# Altium PCB UZ_per_cb_upgrade.PcbDoc
Units mm, origin at the board's own origin, x right, y up, seen from the top; angles counter-clockwise.
Board outline 35 x 100 mm, 2 copper layers (Top Layer, Bottom Layer); 95 components, 68 nets, 263 pads, 43 vias.
Unrouted connection lines stored in the file: 36.
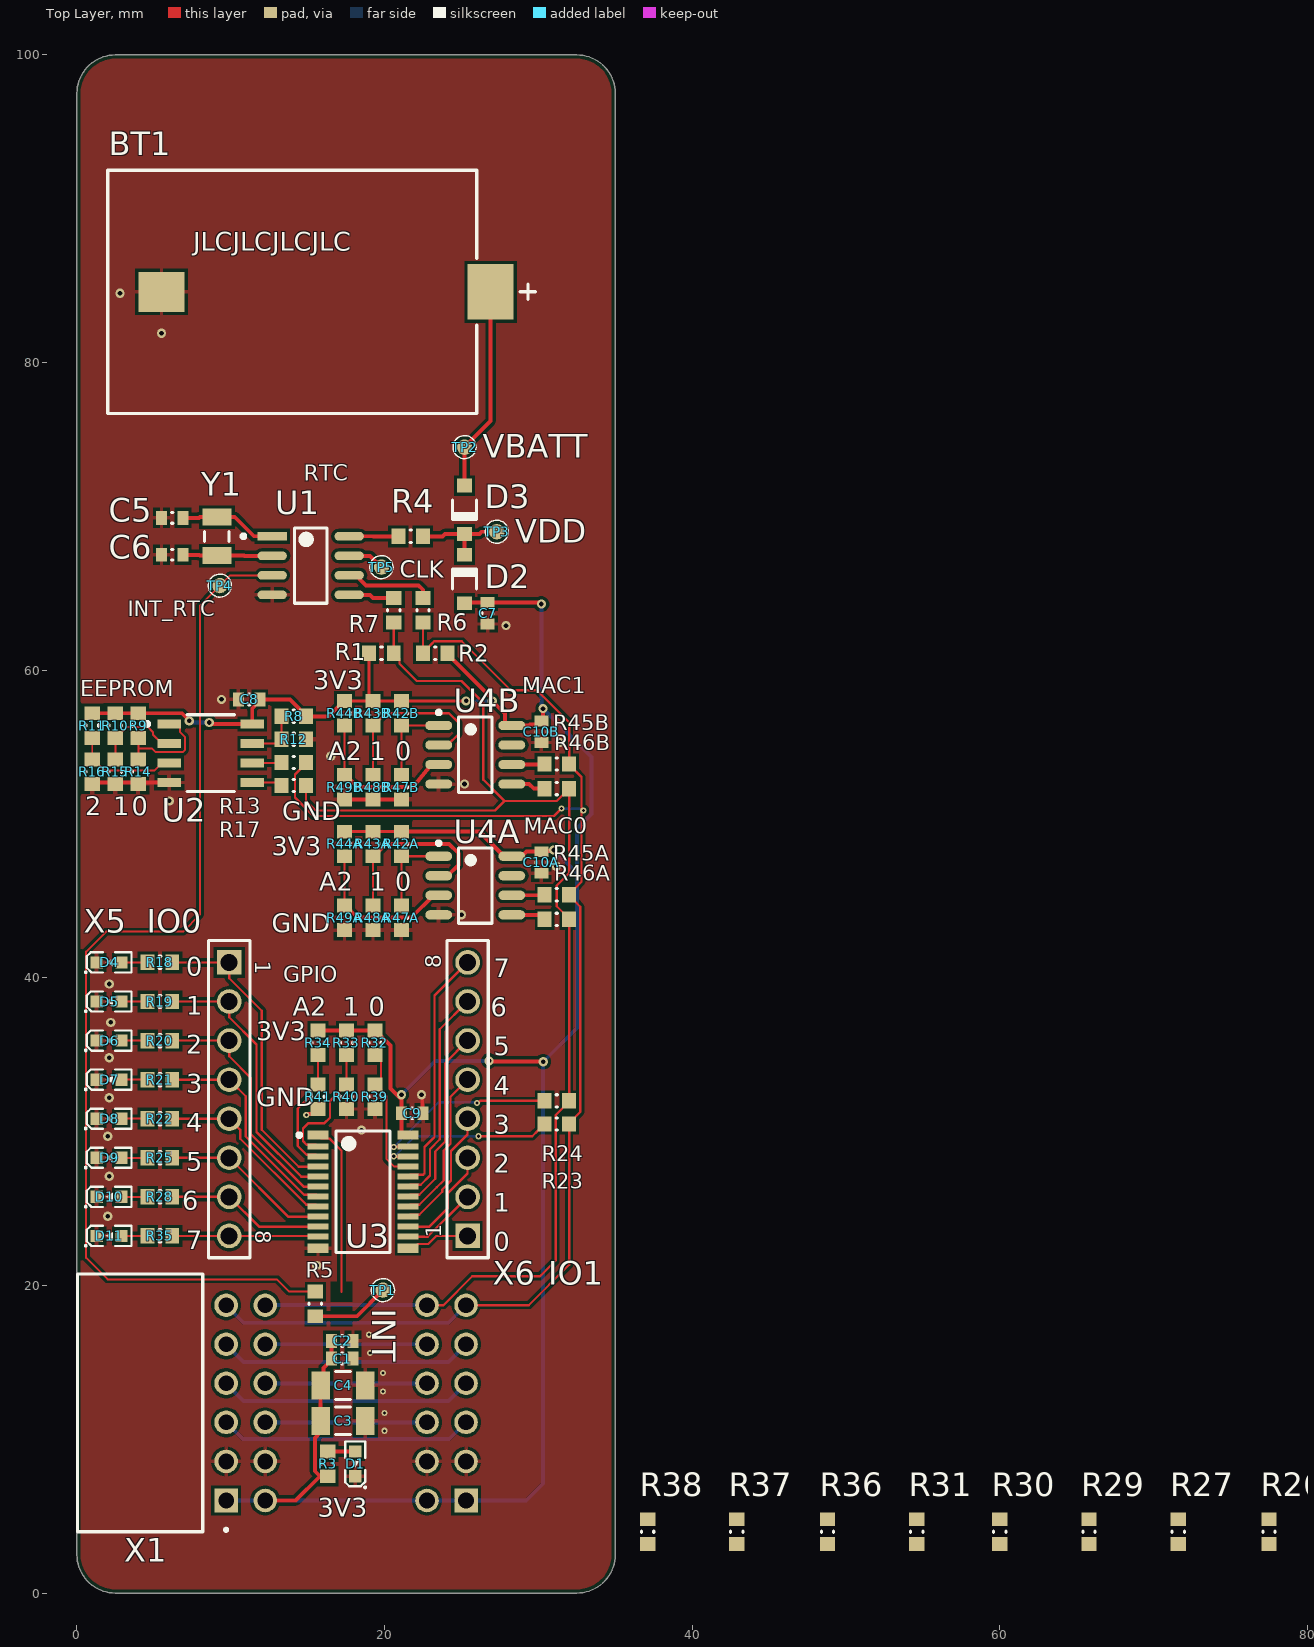
[diagram p0: Top Layer view]
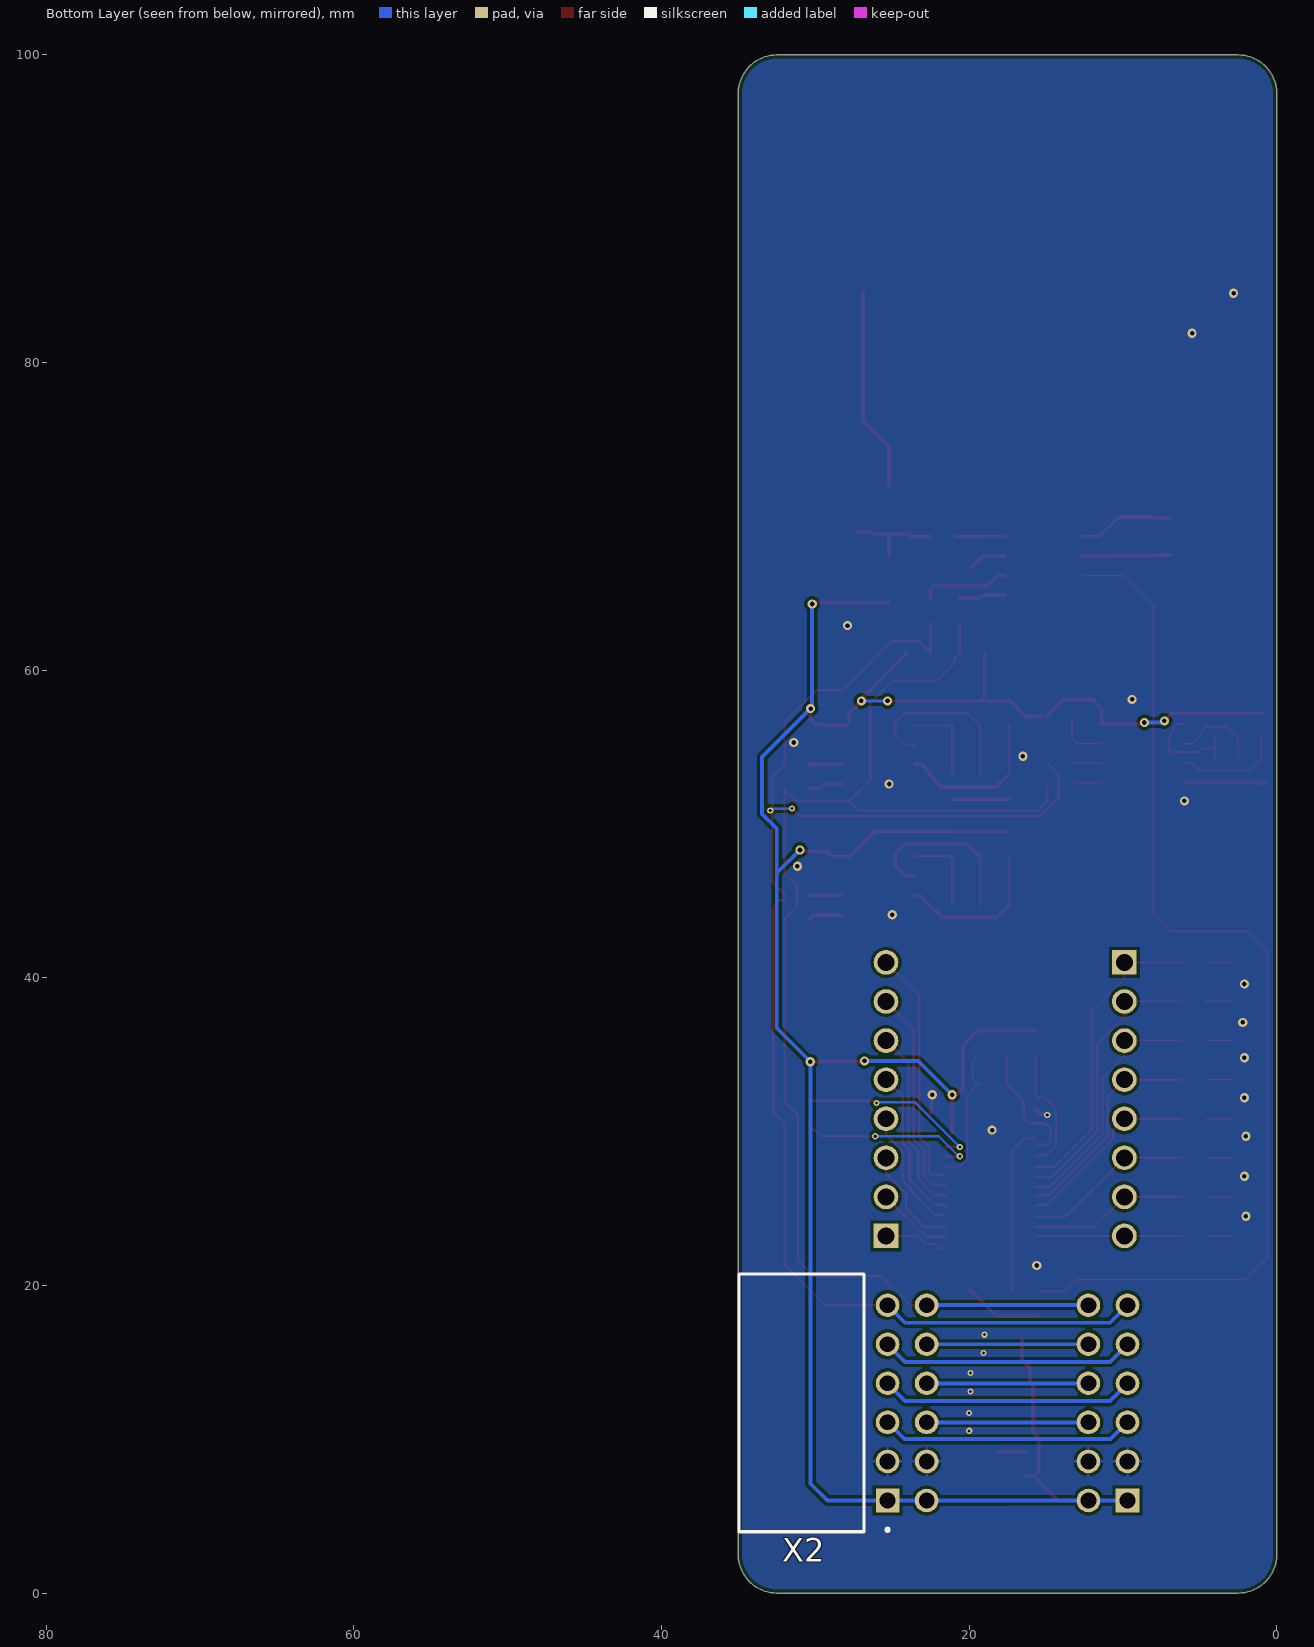
[diagram p1: Bottom Layer view, seen from below]
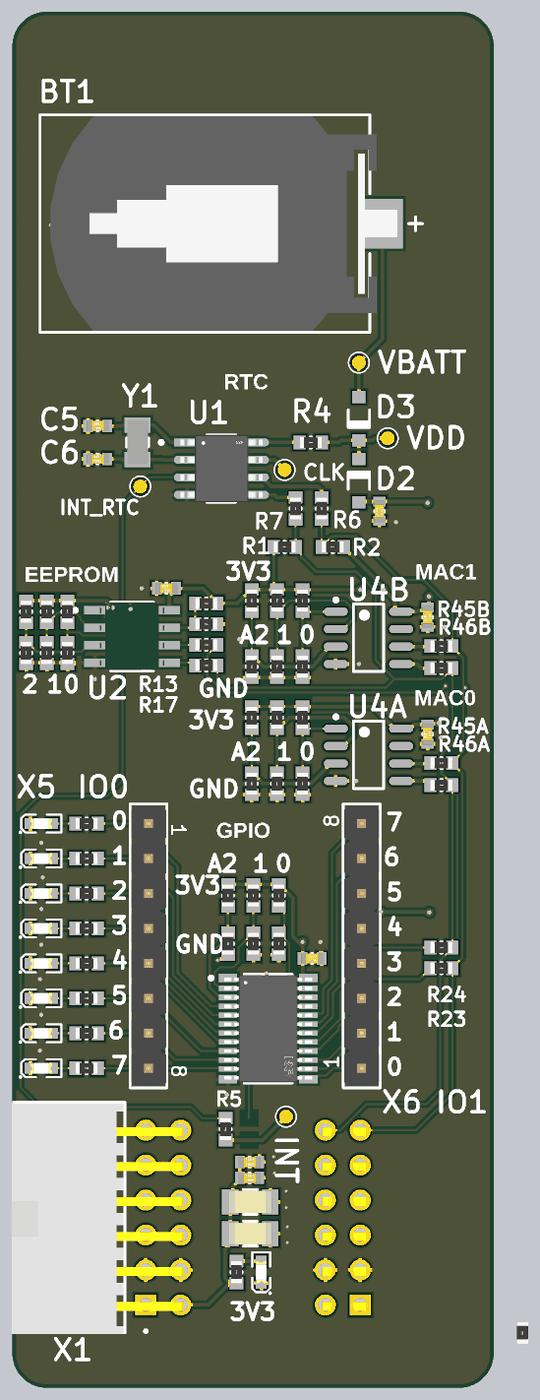
[diagram p2: 3D render of the assembled board from above, using the file's embedded part models]

## Layer stack, top to bottom
Top Solder: solder mask 0.0102, Solder Resist, Dk 3.5
Top Layer: signal copper 0.0356
Dielectric 1: dielectric 0.32, FR-4, Dk 4.8
Bottom Layer: signal copper 0.0356
Bottom Solder: solder mask 0.0102, Solder Resist, Dk 3.5

## Board outline
0,2.5 0,97.5 cw(c2.5,97.5) 2.5,100 32.5,100 cw(c32.5,97.5) 35,97.5 35,2.5 cw(c32.5,2.5) 32.5,0 2.5,0 cw(c2.5,2.5)

## Design rules (kind name [scope] priority, off if disabled: settings)
BoardOutlineClearance [All] p1: gap=0.254 ignorepadtopadclearanceinfootprint=FALSE except(0: Arc-SplitContinuation Track-SplitContinuation SMDPad-SplitContinuation THPad-SplitContinuation Via-SplitContinuation Fill-SplitContinuation Poly-SplitContinuation Region-SplitContinuation Text-SplitContinuation)
Clearance [All] p1: gap=0.2 ignorepadtopadclearanceinfootprint=TRUE
PolygonConnect [All] p1: thpad.connectstyle=Relief thpad.reliefconductorwidth=0.254 thpad.reliefentries=4 thpad.polygonreliefangle="90 Angle" thpad.airgapwidth=0.2 smdpad.connectstyle=Relief smdpad.reliefconductorwidth=0.254 smdpad.reliefentries=4 smdpad.polygonreliefangle="90 Angle" smdpad.airgapwidth=0.2 via.connectstyle=Direct via.reliefconductorwidth=0.254 via.reliefentries=4 via.polygonreliefangle="90 Angle" via.airgapwidth=0.2
RoomDefinition EEPROM_General [InComponentClass('EEPROM_General')] p1: confinementstyle=ConfineIn formatcopy=TRUE lockcomponents=FALSE outline -0.5,51.4 15.9,51.4 15.9,59 -0.5,59
RoomDefinition EEPROM_MAC1 [InComponentClass('EEPROM_MAC1')] p2: confinementstyle=ConfineIn formatcopy=TRUE lockcomponents=FALSE outline 16.3,50.6 33,50.6 33,59 16.3,59
RoomDefinition EEPROM_MAC0 [InComponentClass('EEPROM_MAC0')] p3: confinementstyle=ConfineIn formatcopy=TRUE lockcomponents=FALSE outline 16.3,42.1 33,42.1 33,50.5 16.3,50.5
RoomDefinition GPIO_Expander [InComponentClass('GPIO_Expander')] p4: confinementstyle=ConfineIn formatcopy=TRUE lockcomponents=FALSE outline 0.1,17 33,17 33,42.9 0.1,42.9
RoomDefinition RTC [InComponentClass('RTC')] p5: confinementstyle=ConfineIn formatcopy=TRUE lockcomponents=FALSE outline 1.5,58.3 30.2,58.3 30.2,93 1.5,93
RoutingVias [All] p1: holewidth=0.3 width=0.6 viastyle="Through Hole" minholewidth=0.2 minwidth=0.4 maxholewidth=0.711 maxwidth=1.27
SolderMaskExpansion [All] p1: expansion=0.102 istentingtop=FALSE
Width [All] p1: maxlimit=0.254 minlimit=0.127 preferedwidth=0.254 minimp=50.000000 maximp=50.000000 favimp=50.000000
30 further rules are at their usual default settings.

## Classes and differential pairs
component class EEPROM_General: C8 R8 R9 R10 R11 R12 R13 R14 R15 R16 R17 U2
channel class EEPROM_MAC: EEPROM_MAC0 EEPROM_MAC1
component class GPIO_Expander: C9 D4 D5 D6 D7 D8 D9 D10 D11 R18 R19 R20 R21 R22 R23 R24 R25 R26 R27 R28 R29 R30 R31 R32 R33 R34 R35 R36 R37 R38 R39 R40 R41 U3 X5 X6
component class EEPROM_MAC1: C10B R42B R43B R44B R45B R46B R47B R48B R49B U4B
component class EEPROM_MAC0: C10A R42A R43A R44A R45A R46A R47A R48A R49A U4A
component class RTC: BT1 C5 C6 C7 D2 D3 R4 R5 R6 R7 TP2 TP3 TP4 TP5 U1 Y1
component class XMOD: C1 C2 C3 C4 D1 R3 X1 X2
component class Top_sheet: INFO1 LOGO1 R1 R2 Serial1 TP1

## Components (designator, comment, footprint, x,y, rotation, side; value= is the part's Value field where it differs from the comment)
BT1 "S8421-45R" FP-S8421-45R-MFG 14,84.6 r90 top
C1 "100nF" C_0603(1608)100_L 17.25,15.25 r0 top
C2 "100nF" C_0603(1608)100_L 17.25,16.4 r0 top
C3 "10µF" C_1206 17.3,11.2 r0 top
C4 "10µF" C_1206 17.3,13.5 r0 top
C5 "10pF" C_0603(1608)100_L 6.2,69.9 r180 top
C6 "10pF" C_0603(1608)100_L 6.2,67.5 r180 top
C7 "100nF" C_0603(1608)100_L 26.7,63.7 r270 top
C8 "100nF" C_0603(1608)100_L 11.2,58.1 r180 top
C9 "100nF" C_0603(1608)100_L 21.8,31.2 r0 top
C10A "100nF" C_0603(1608)100_L 30.2,47.5 r270 top (schematic designator C10)
C10B "100nF" C_0603(1608)100_L 30.2,56 r270 top (schematic designator C10)
D1 "150060RS75000" WL-SMCW_0603 18.1,8.4 r90 top
D2 "1N4148W-7-F" DIOD-SOD123-2_V 25.2,65.925 r90 top
D3 "1N4148W-7-F" DIOD-SOD123-2_V 25.2,70.425 r270 top
D4 "150060GS75000" WL-SMCW_0603 2.1,41 r0 top
D5 "150060GS75000" WL-SMCW_0603 2.1,38.46 r0 top
D6 "150060GS75000" WL-SMCW_0603 2.1,35.92 r0 top
D7 "150060GS75000" WL-SMCW_0603 2.1,33.38 r0 top
D8 "150060GS75000" WL-SMCW_0603 2.1,30.84 r0 top
D9 "150060GS75000" WL-SMCW_0603 2.1,28.3 r0 top
D10 "150060GS75000" WL-SMCW_0603 2.1,25.76 r0 top
D11 "150060GS75000" WL-SMCW_0603 2.1,23.22 r0 top
R1 "2k" R_0603_N 19.8,61.1 r180 top
R2 "2k" R_0603_N 23.3,61.1 r0 top
R3 "680R" R_0603_N 16.3,8.4 r270 top
R4 "0R" R_0603_N 21.7,68.7 r0 top
R5 "0R" R_0603_N 15.5,18.8 r90 top
R6 "0R" R_0603_N 22.5,63.9 r90 top
R7 "0R" R_0603_N 20.6,63.9 r90 top
R8 "0R" R_0603_N 14.1,57 r180 top
R9 "0R" R_0603_N 4,56.4 r270 top
R10 "0R" R_0603_N 2.5,56.4 r270 top
R11 "0R" R_0603_N 1,56.4 r270 top
R12 "0R" R_0603_N 14.1,55.5 r0 top
R13 "0R" R_0603_N 14.1,54 r180 top
R14 "0R" R_0603_N 4,53.4 r270 top
R15 "0R" R_0603_N 2.5,53.4 r270 top
R16 "0R" R_0603_N 1,53.4 r270 top
R17 "0R" R_0603_N 14.1,52.5 r180 top
R18 "680R" R_0603_N 5.4,41 r180 top
R19 "680R" R_0603_N 5.4,38.46 r180 top
R20 "680R" R_0603_N 5.4,35.92 r180 top
R21 "680R" R_0603_N 5.4,33.38 r180 top
R22 "680R" R_0603_N 5.4,30.84 r180 top
R23 "0R" R_0603_N 31.2,30.5 r180 top
R24 "0R" R_0603_N 31.2,32 r180 top
R25 "680R" R_0603_N 5.4,28.3 r180 top
R26 "10k" R_0603_N 77.5,4 r90 top
R27 "10k" R_0603_N 71.6,4 r90 top
R28 "680R" R_0603_N 5.4,25.76 r180 top
R29 "10k" R_0603_N 65.8,4 r90 top
R30 "10k" R_0603_N 60,4 r90 top
R31 "10k" R_0603_N 54.6,4 r90 top
R32 "0R" R_0603_N 19.377,35.773 r270 top
R33 "0R" R_0603_N 17.527,35.773 r270 top
R34 "0R" R_0603_N 15.677,35.773 r270 top
R35 "680R" R_0603_N 5.4,23.22 r180 top
R36 "10k" R_0603_N 48.8,4 r90 top
R37 "10k" R_0603_N 42.9,4 r90 top
R38 "10k" R_0603_N 37.1,4 r90 top
R39 "0R" R_0603_N 19.377,32.273 r270 top
R40 "0R" R_0603_N 17.527,32.273 r270 top
R41 "0R" R_0603_N 15.677,32.273 r270 top
R42A "0R" R_0603_N 21.1,48.7 r270 top (schematic designator R42)
R42B "0R" R_0603_N 21.1,57.2 r270 top (schematic designator R42)
R43A "0R" R_0603_N 19.25,48.7 r270 top (schematic designator R43)
R43B "0R" R_0603_N 19.25,57.2 r270 top (schematic designator R43)
R44A "0R" R_0603_N 17.4,48.7 r270 top (schematic designator R44)
R44B "0R" R_0603_N 17.4,57.2 r270 top (schematic designator R44)
R45A "0R" R_0603_N 31.2,45.4 r180 top (schematic designator R45)
R45B "0R" R_0603_N 31.2,53.9 r180 top (schematic designator R45)
R46A "0R" R_0603_N 31.2,43.8 r180 top (schematic designator R46)
R46B "0R" R_0603_N 31.2,52.3 r180 top (schematic designator R46)
R47A "0R" R_0603_N 21.1,43.9 r270 top (schematic designator R47)
R47B "0R" R_0603_N 21.1,52.4 r270 top (schematic designator R47)
R48A "0R" R_0603_N 19.25,43.9 r270 top (schematic designator R48)
R48B "0R" R_0603_N 19.25,52.4 r270 top (schematic designator R48)
R49A "0R" R_0603_N 17.4,43.9 r270 top (schematic designator R49)
R49B "0R" R_0603_N 17.4,52.4 r270 top (schematic designator R49)
TP1 "INT" TP_1mm 19.9,19.7 r270 top value="Testpoint 1mm"
TP2 "VBATT" TP_1mm 25.2,74.5 r0 top value="Testpoint 1mm"
TP3 "VDD" TP_1mm 27.3,69 r0 top value="Testpoint 1mm"
TP4 "INT_RTC" TP_1mm 9.3,65.5 r0 top value="Testpoint 1mm"
TP5 "CLK" TP_1mm 19.8,66.7 r0 top value="Testpoint 1mm"
U1 "PCF8563T/5,518" FP-SOT96-1-IPC_B 15.2,66.8 r0 top
U2 "AT24C02C-SSHM-T" FP-C04-057-SN-MFG 8.7,54.6 r0 top
U3 "PCA9535PW,112" FP-SOT355-1-MFG 18.6,26.1 r0 top
U4A "24AA025E48T-I/SN" MCHP-SOIC-SN8_L 25.9,46 r0 top (schematic designator U4)
U4B "24AA025E48T-I/SN" MCHP-SOIC-SN8_L 25.9,54.5 r0 top (schematic designator U4)
X1 "IPL1-106-01-X-D-RA-K" SAMTEC_IPL1-106-01-X-D-RA-K 10.97,12.37 r90 top
X2 "IPL1-106-01-X-D-RA-K" SAMTEC_IPL1-106-01-X-D-RA-K 24.03,12.37 r90 bottom
X5 "61300811121" 61300811121 9.9,32.11 r270 top
X6 "61300811121" 61300811121 25.4,32.11 r90 top
Y1 "ABS07-32.768KHz-T" FP-ABS07-MFG 9.1,68.7 r270 top

## Footprints (in the part's own frame and the unit in brackets; to place one, negate y for a bottom-side part, rotate by r counter-clockwise, add the part's x,y. Pads: shape width x height; smd on the part's side, far side on the other; paste and mask are expansions set on the pad)
61300811121 [mm] "Pin Header, pitch 2.54 mm, THT, Vertical, single row, 8p"
  rect 1.6x1.6 hole 1.1: 1(-8.89,0)
  round 1.6 hole 1.1: 2(-6.35,0) 3(-3.81,0) 4(-1.27,0) 5(1.27,0) 6(3.81,0) 7(6.35,0) 8(8.89,0)
  silkscreen extent -10.31,-1.35 10.31,1.35, body extent -10.16,-1.27 10.16,1.27, height 8.57
C_0603(1608)100_L [mm] "Chip Capacitor, Body 1.6x0.8mm, Height 1.0mm, IPC High Density"
  rect 0.7x0.9 smd: 1(-0.7,0) 2(0.7,0)
  silkscreen extent -0.05,-0.35 0.05,0.35, body extent -0.8,-0.4 0.8,0.4, height 0.8
C_1206 [mm]
  rect 1.21x1.82 smd: 1(1.45,0) 2(-1.45,0)
  silkscreen extent -0.5,-0.9 0.5,0.9, body extent -1.6,-0.81 1.6,0.81, height 1.82
DIOD-SOD123-2_V [mm] "SOD123, 2-Leads, Body 2.7x1.55mm, Height 1.45mm"
  rect 0.9x0.95 smd: 1(-1.575,0) 2(1.575,0)
  silkscreen extent -0.64,-0.83 0.63,0.78, body extent -1.35,-0.77 1.35,0.77, height 1.45
FP-ABS07-MFG [mm]
  rect 1.1x1.9 smd paste+0 mask+0: 1(-1.25,0) 2(1.25,0)
  silkscreen extent -0.33,-0.8 0.32,0.8, body extent -1.9,-1.05 1.9,1.05, height 0.25
FP-C04-057-SN-MFG [mm]
  rect 1.55x0.6 smd paste+0 mask+0: 1(-2.7,1.905) 2(-2.7,0.635) 3(-2.7,-0.635) 4(-2.7,-1.905) 5(2.7,-1.905) 6(2.7,-0.635) 7(2.7,0.635) 8(2.7,1.905)
  silkscreen extent -4.25,-2.5 1.55,2.5, body extent -3.57,-2.75 3.57,2.75, height 0.25
FP-S8421-45R-MFG [mm]
  rect 2.6x3 smd paste+0 mask+0: 1(0,8.5)
  rect 3.6x3 smd paste+0 mask+0: 2(0,-12.9)
  silkscreen extent -7.9,-15.82 7.9,11.99, body extent -8,-14.5 8,12.09, height 0.25
FP-SOT96-1-IPC_B [mm]
  rect 1.904x0.568 smd paste+0 mask+0: 1(-2.501,1.905)
  rrect100% 1.904x0.568 smd paste+0 mask+0: 2(-2.501,0.635) 3(-2.501,-0.635) 4(-2.501,-1.905) 5(2.501,-1.905) 6(2.501,-0.635) 7(2.501,0.635) 8(2.501,1.905)
  silkscreen extent -4.5,-2.45 1.05,2.45, body extent -3.7,-2.7 3.7,2.7, height 0.25
FP-SOT355-1-MFG [mm]
  rect 1.35x0.6 smd paste+0 mask+0: 1(-2.925,3.675) 12(-2.925,-3.675) 13(2.925,-3.675) 24(2.925,3.675)
  rect 1.35x0.4 smd paste+0 mask+0: 2(-2.925,2.925) 3(-2.925,2.275) 4(-2.925,1.625) 5(-2.925,0.975) 6(-2.925,0.325) 7(-2.925,-0.325) 8(-2.925,-0.975) 9(-2.925,-1.625) 10(-2.925,-2.275) 11(-2.925,-2.925) 14(2.925,-2.925) 15(2.925,-2.275) 16(2.925,-1.625) 17(2.925,-0.975) 18(2.925,-0.325) 19(2.925,0.325) 20(2.925,0.975) 21(2.925,1.625) 22(2.925,2.275) 23(2.925,2.925)
  silkscreen extent -4.27,-3.95 1.75,3.95, body extent -3.72,-4.3 3.72,4.3, height 0.25
MCHP-SOIC-SN8_L [mm] "SOIC, 8-Leads, Body 4.9x3.9mm, Pitch 1.27mm, IPC High Density"
  oval 1.75x0.6 smd: 1(-2.375,1.905) 2(-2.375,0.635) 3(-2.375,-0.635) 4(-2.375,-1.905) 5(2.375,-1.905) 6(2.375,-0.635) 7(2.375,0.635) 8(2.375,1.905)
  silkscreen extent -2.5,-2.45 1.1,2.88, body extent -1.95,-2.45 1.95,2.45, height 1.75
R_0603_N [mm] "SMD Resistor, Body 1.6x0.8mm, IPC Medium Density"
  rect 0.9x1 smd: 1(-0.8,0) 2(0.8,0)
  silkscreen extent -0.05,-0.4 0.05,0.4, body extent -0.8,-0.4 0.8,0.4, height 0.44
SAMTEC_IPL1-106-01-X-D-RA-K [mm]
  rect 1.53x1.53 hole 1.02: 01(-6.35,1.27)
  round 1.53 hole 1.02: 02(-3.81,1.27) 03(-1.27,1.27) 04(1.27,1.27) 05(3.81,1.27) 06(6.35,1.27) 07(-6.35,-1.27) 08(-3.81,-1.27) 09(-1.27,-1.27) 10(1.27,-1.27) 11(3.81,-1.27) 12(6.35,-1.27)
  silkscreen extent -8.38,1.17 8.38,10.92, body extent -8.48,-1.49 8.28,11.02, height 8.19
TP_1mm [mm]
  round 1 smd paste-1: 1(0,0)
  silkscreen extent -0.75,-0.75 0.75,0.75
WL-SMCW_0603 [mm] "SMD Mono-color Chip LED, body 1.6x0.8mm"
  rect 0.8x0.8 smd: 1(-0.8,0) 2(0.8,0)
  silkscreen extent -1.59,-0.7 1.45,0.65, body extent -0.8,-0.4 0.8,0.4, height 0.7

## Part data
BT1: library part CMP-2000-07028-3, "BATTERY HOLDER COIN 20MM SMD", Case/Package=SMD/SMT, LCSC Part #=C964790, Max Operating Temperature=105°C, Min Operating Temperature=-40°C, Package Quantity=500, Supplier Part Number 1=855-S8421-45R, Contact Plating=Bronze, Material=Polyphenylene, Mount="Surface Mount", Number of Batteries=1, Number of Cells=1, Packaging="Tape and Reel", REACH SVHC="No SVHC", Supplier 1=Mouser, Termination=SMD/SMT
C1 C2 C7 C8 C9 C10A C10B: library part C_0603, "CAP 0603 (1608 Metric) SMD", Case-EIA=0603, Case-Metric=1608, LCSC Part #=C14663, Rated Voltage="50 V", Tolerance=±5%, Created=2018_09_06_AGeiger, Max Thickness="1 mm", Package=0603, Technology=SMT
C3 C4: "Capacitor 1206", Dielectric=X5R, LCSC Part #=C13585, MPN=GMK316BJ106KL-T, Package=1206, Supplier Part Number 1=963-GMK316BJ106KL-T, Tolerance=10%, Voltage="35 V", Created=2018_06_25_AGeiger, MF="Taiyo Yuden", Supplier 1=Mouser
C5 C6: library part C_0603, "CAP 0603 (1608 Metric) SMD", Case-EIA=0603, Case-Metric=1608, LCSC Part #=C1634, Rated Voltage="50 V", Tolerance=±5%, Created=2018_09_06_AGeiger, Max Thickness="1 mm", Package=0603, Technology=SMT
D1: library part LED_Red_0603, "WL-SMCW SMD Mono-color Chip LED Waterclear, size 0603, Red, 2 V, 140°", Emitting Color=Red, Forward Voltage="2 V", LCSC Part #=C2286, Package=0603, Supplier Part Number 1=2322071, ComponentLink1Description=Manufacturer, ComponentLink1URL=http://www.we-online.de, ComponentLink2Description=Datasheet, ComponentLink2URL=http://katalog.we-online.com/led/datasheet/150060RS75000.pdf, Created=2018_09_06_AGeiger, Dominant Wavelength="625 nm", Luminous Intensity="250 mcd", MF="Wuerth Elektronik", MPN=150060RS75000, Peak Wavelength="630 nm", Published Date="Sep. 2017", Size=0603, Supplier 1=Farnell, Supplier 2=Mouser, Supplier 3=Digi-Key, Supplier Part Number 2=710-150060RS75000, Supplier Part Number 3=732-4978-1-ND, Viewing Angle=140°
D2 D3: library part CMP-2000-04932-2, "Fast Switching Diode, 100 V, 0.15 A, -65 to 150 degC, 2-Pin?SOD123, RoHS, Tape and Reel", If - Forward Current=0.15A, Ir - Reverse Current=1uA, LCSC Part #=C81598, Manufacturer=DiodesIncorporated, Max Surge Current=2A, Maximum Operating Temperature=+150C, Minimum Operating Temperature=-65C, Operating Temperature Range=-65Cto+150C, Package / Case=SOD-123, Package Reference=SOD123-2, Peak Reverse Voltage=100V, Vf - Forward Voltage=1.25V, Brand=DiodesIncorporated, Configuration=Single, Datasheet URL=http://www.farnell.com/datasheets/1915529.pdf, Datasheet Version="Rev. 24-2, 10/2013", Factory Pack Quantity=3000, Height=1.25mm, Length=2.85mm, Manufacturer URL=http://www.diodes.com/, Mounting Style=SMD/SMT, Package URL=http://www.diodes.com/datasheets/ds18004.pdf, Packaging=Reel, Product=SwitchingDiodes, Product Category=Diodes-GeneralPurpose,Power,Switching, Recovery Time=4ns, RoHS=True, Series=1N4148, Type=SwitchingDiode, Unit Weight=0.000353oz, Width=1.7mm
D4 D5 D6 D7 D8 D9 D10 D11: library part LED_Green_0603, "WL-SMCW SMD Mono-color Chip LED Waterclear, size 0603, Green, 3.2 V, 140°", Emitting Color=Green, Forward Voltage="3.2 V", LCSC Part #=C72043, Package=0603, Supplier Part Number 1=2322070, ComponentLink1Description=Manufacturer, ComponentLink1URL=http://www.we-online.de, ComponentLink2Description=Datasheet, ComponentLink2URL=http://katalog.we-online.com/led/datasheet/150060GS75000.pdf, Created=2018_09_06_AGeiger, Dominant Wavelength="520 nm", Luminous Intensity="430 mcd", MF="Wuerth Elektronik", MPN=150060GS75000, Peak Wavelength="515 nm", Published Date="Sep. 2017", Size=0603, Supplier 1=Farnell, Supplier 2=Mouser, Supplier 3=Digi-Key, Supplier Part Number 2=710-150060GS75000, Supplier Part Number 3=732-4971-1-ND, Viewing Angle=140°
R1 R2: "SMD Resistor 0603", LCSC Part #=C22975, MPN=RC0603FR-072KL, Package=0603, Power="100 mW", Supplier Part Number 1=603-RC0603FR-072KL, Tolerance=1%, Voltage="75 V", Created=2018_09_06_AGeiger, MF=Yageo, Supplier 1=Mouser
R3 R18 R19 R20 R21 R22 R25 R28 R35: "SMD Resistor 0603", LCSC Part #=C23228, MPN=CR0603-FX-3901ELF, Package=0603, Power="100 mW", Supplier Part Number 1=652-CR0603-FX3901ELF, Tolerance=1%, Voltage=75V, Created=2018_09_06_AGeiger, MF=Bourns, Supplier 1=Mouser
R4 R5 R6 R7 R8 R9 R10 R11 R12 R13 R14 R15 R16 R17 R23 R24 R32 R33 R34 R39 R40 R41 R42A R42B R43A R43B R44A R44B R45A R45B R46A R46B R47A R47B R48A R48B R49A R49B: "SMD Resistor 0603", LCSC Part #=C21189, Package=0603, Power="100 mW", Supplier Part Number 1=71-CRCW06030000Z0EBC, Tolerance=1%, Voltage=75V, Created=2018_09_06_AGeiger, Supplier 1=Mouser
R26 R27 R29 R30 R31 R36 R37 R38: "SMD Resistor 0603", LCSC Part #=C25804, MPN=RC0603FR-072KL, Package=0603, Power="100 mW", Supplier Part Number 1=603-RC0603FR-1010KL, Tolerance=1%, Voltage="75 V", Created=2018_09_06_AGeiger, MF=Yageo, Supplier 1=Mouser
TP1 TP2 TP3 TP4 TP5: "Testpoint 1mm", Created=2018_06_25_AGeiger
U1: library part CMP-10083-000010-1, "IC RTC CLK/CALENDAR I2C 8-SOIC", Ambient Temperature Range High=+85°C, Ambient Temperature Range Low=-40°C, Frequency=400kHz, LCSC Part #=C7440, Manufacturer=NXP, Max Supply Voltage=5.5V, Min Supply Voltage=1V, Nominal Supply Current=0.225-0.95uA, Package=SOT96-1, Temperature="-40°C to +85°C", Automotive=No, Category=IC, ComponentLink2Description=Datasheet, ComponentLink2URL=https://www.nxp.com/docs/en/data-sheet/PCF8563.pdf, Device Class L1="Integrated Circuits (ICs)", Device Class L2="Clock and Timing", Device Class L3="Real Time Clocks", Digikey Description="IC RTC CLK/CALENDAR I2C 8-SOIC", Footprint Url=https://www.nxp.com/docs/en/package-information/SOT96-1.pdf, Height=1.75mm, Interface=I2C,2-Wire, Lead Free=Yes, Manufacturer Part Number=PCF8563T/5,518, Mouser Description="Real Time Clock Binary I2C 1-5V RTC IC", Number of Outputs=1, Octopart=https://octopart.com/pcf8563t%2F5%2C518-nxp+semiconductors-19647995, RoHS=TRUE, Standoff Height=0.1mm, Temperature Range High=+85°C, Temperature Range Low=-40°C
U2: library part CMP-06313-000008-1, "IC EEPROM 2K I2C 1MHZ 8SOIC", Frequency=1000kHz, LCSC Part #=C6203, Manufacturer=Microchip, Max Supply Voltage=5.5V, Min Supply Voltage=1.7V, Nominal Supply Current=0.4-2mA, Package=C04-057-SN, Temperature="-40°C to +85°C", Temperature Range High=+85°C, Temperature Range Low=-40°C, Access Time=900ns, Automotive=No, Category=IC, ComponentLink2Description=Datasheet, ComponentLink2URL=http://ww1.microchip.com/downloads/en/DeviceDoc/AT24C01C-AT24C02C-I2C-Compatible-Two-Wire-Serial-EEPROM-1Kbit-2Kbit-20006111A.pdf, Device Class L1="Integrated Circuits (ICs)", Device Class L2=Memory, Device Class L3=EEPROM, Digikey Description="IC EEPROM 2K I2C 1MHZ 8SOIC", Footprint Url=http://ww1.microchip.com/downloads/en/DeviceDoc/08L_SOIC_150_3dot9mm_SN_C04-00057e.pdf, Height=1.75mm, Interface=I2C,2-Wire, Ipc Land Pattern Name=SOIC127P600X175-8, Lead Free=Yes, Manufacturer Part Number=AT24C02C-SSHM-T, Memory Size=2Kbits, Memory Type=EEPROM, Mouser Description="EEPROM Serial-2Wire 2K-bit 256 x 8 1.8V/2.5V/3.3V/5V Automotive 8-Pin SOIC T/R", Octopart=https://octopart.com/at24c02c-sshm-t-microchip-77757935, RoHS=TRUE, Standoff Height=0.1mm
U3: library part CMP-10112-000006-1, "IC I/O EXPANDER I2C 16B 24TSSOP", Ambient Temperature Range High=+85°C, Ambient Temperature Range Low=-40°C, Frequency=0-400kHz, Manufacturer="NXP Semiconductors", Max Supply Voltage=5.5V, Min Supply Voltage=2.3V, Nominal Supply Current=135uA, Package=SOT355-1, Temperature="-40°C to +85°C", Automotive=No, Category=IC, ComponentLink2Description=Datasheet, ComponentLink2URL=https://www.nxp.com/docs/en/data-sheet/PCA9535_PCA9535C.pdf, Device Class L1="Integrated Circuits (ICs)", Device Class L2="Interface ICs", Device Class L3="I/O Expanders", Digikey Description="IC I/O EXPANDER I2C 16B 24TSSOP", Footprint Url=https://www.nxp.com/docs/en/package-information/SOT355-1.pdf, Height=1.1mm, Interface=I2C,SMBus, Ipc Land Pattern Name=SOP65P640X110-24, Lead Free=Yes, Manufacturer Part Number=PCA9535PW,112, Mouser Description="Interface - I/O Expanders I2C/SMBUS 16BIT GPIO", Number Of I/Os=16, Octopart=https://octopart.com/pca9535pw%2C112-nxp+semiconductors-9518143, RoHS=TRUE, Standoff Height=0.05mm, Temperature Range High=+85°C, Temperature Range Low=-40°C
U4A U4B: library part CMP-0159-01016-1, "2K bits I2C™ Serial EEPROM with EUI-48™ Node Identity, 1.7 to 5.5 V, 400 kHz, -40 to 85 degC, 8-pin SOIC (SN8), Tape and Reel", Manufacturer=Microchip, ComponentLink1Description="Manufacturer URL", ComponentLink1URL=http://www.microchip.com, ComponentLink2Description=Datasheet, ComponentLink2URL=http://ww1.microchip.com/downloads/en/DeviceDoc/22124D.pdf, ComponentLink3Description="Package Specification", ComponentLink3URL=http://www.microchip.com/stellent/groups/techpub_sg/documents/packagingspec/en012702.pdf, ComponentLink4Description="Product URL", ComponentLink4URL=http://www.microchip.com/24AA025E48, DatasheetVersion="Rev. D", Mounting Technology="Surface Mount", PackageDescription="8-Lead Plastic Small Outline, 4.9 x 3.9 mm Body, 1.27 mm Pitch", PackageReference=SOIC-SN8, PackageVersion=C04-057C, PartNumber=24AA025E48T-I/SN
X1 X2: "Connector Header Through Hole, Right Angle 12 position 0.100 (2.54mm)", Package=None, Availability=Bad, Check_prices=https://www.snapeda.com/parts/IPL1-106-01-L-D-RA-K/Samtec%20Inc./view-part/3223018/?ref=eda, MF=Samtec, MP=IPL1-106-01-L-D-RA-K, Price=None, Purchase-URL=https://pricing.snapeda.com/search/part/IPL1-106-01-L-D-RA-K/?ref=eda, SnapEDA_Link=https://www.snapeda.com/parts/IPL1-106-01-L-D-RA-K/Samtec%20Inc./view-part/3223018/?ref=snap
X5 X6: library part CMP-1502-01076-1, "THT Vertical Pin Header WR-PHD, Pitch 2.54 mm, Single Row, 8 pins", Contact Resistance=20mOhm, Manufacturer="Wurth Elektronik", Operating Temperature=-40to105degC, Rated Current=3A, Withstanding Voltage=500VAC, Working Voltage=250VAC, Datasheet URL=https://katalog.we-online.de/em/datasheet/6130xx11121.pdf, Gender=Male, Manufacturer URL=http://www.we-online.de, Mounting Technology=THT, Orientation=Vertical, Package Reference=61300811121, Packaging=Bag, Part Number=61300811121, Pin Number=8, Pitch=2.54mm, Publisher=WurthElektronik, Row Number=Single
Y1: library part CMP-0447-00001-3, "CRYSTAL 32.7680KHZ 12.5PF SMD", Case/Package=CSMD, ESR (Equivalent Series Resistance)=70kR, Frequency=32.768kHz, Frequency Tolerance=20ppm, LCSC Part #=C32346, Load Capacitance=12.5pF, Max Operating Temperature=85°C, Min Operating Temperature=-40°C, Operating Frequency="32.768 kHz", Package Quantity=3000, Depth=1.5mm, Height=0.035inch, Lead Free="Lead Free", Length=3.2mm, Number of Pins=2, Packaging="Tape and Reel", Radiation Hardening=No, REACH SVHC="No SVHC", RoHS Compliant=Yes, Series=ABS07, Series Resistance=70kR, Termination=SMD/SMT, Tolerance=20ppm, Width=0.061inch

## Via types
v1: diameter 0.6, hole 0.3, Top Layer to Bottom Layer, tented both sides, 30 vias
v2: diameter 0.4, hole 0.2, Top Layer to Bottom Layer, tented both sides, 13 vias

## Nets (pads, with @x,y where several pads share a name; then routed paths per layer and width w, separated by ;. In a path a pad name is that pad's centre, name@x,y a point inside that pad or via, vN(x,y) a via of type N, cw(c..) or ccw(c..) an arc to the next point about the centre after c; other vN are vias at no path point)
1V8_PER: 
3V3_PER: C1.1 C2.1 C3.2 C4.2 C7.1 C8.1 C9.1 C10A.1 C10B.1 D2.1 R1.2 R2.2 R3.2 R8.1 R9.1 R10.1 R11.1 R18.1 R19.1 R20.1 R21.1 R22.1 R25.1 R28.1 R32.1 R33.1 R34.1 R35.1 R42A.1 R42B.1 R43A.1 R43B.1 R44A.1 R44B.1 U2.8 U3.24 U4A.8 U4B.8 X1.01 X1.07 X2.01 X2.07 | length 181.2
  Top Layer w0.2: R44A.1 R43A.1 R42A.1 ; R44B.1 R43B.1 ; R1.2 19,58.25 R43B.1 ; v1(25.3,58) R42B.1 R43B.1 ; 26.105,49.5 U4A.8@27.7,47.905
  Top Layer w0.254: R11.1 R10.1 R9.1 6.842,57.2 7.272,56.77 7.272,56.728 v1(7.3,56.7) ; v1(8.6,56.6) 8.695,56.505 U2.8 11.4,57.5 11.9,58 C8.1 13.85,58.1 14.9,57.05 R8.1 ; X1.07 14.213,6.02 15.793,7.6 ; R8.1@15.3,57 16.35,57 17.35,58 R44B.1 ; R34.1 R33.1 R32.1 19.427,36.573 20.4,35.6 20.4,32.8 21.1,32.1 ; R3.2 15.793,7.6 ; C2.1 C1.1 16.55,15.15 16.042,14.642 16.042,13.692 C4.2 15.85,10.465 15.469,10.084 15.469,7.925 15.793,7.6 ; U3.24@21.1,29.948 21.1,32.1 ; v1(21.1,32.4) 21.1,32.1 ; R42A.1 26.105,49.5 26.195,49.5 27.79,47.905 U4A.8 28.944,47.905 29.239,48.2 C10A.1 30.256,48.256 30.937,48.256 v1(30.993,48.311) ; R2.2@24.1,61.15 R2.2 24.1,61.05 26.934,58.216 26.934,58.066 v1(27,58) 27.82,57.18 27.82,56.565 27.98,56.405 U4B.8 29.395,56.405 29.467,56.477 29.977,56.477 C10B.1 30.3,56.8 v1(30.3,57.5) ; D2.1 25.25,64.4 C7.1 30.06,64.4 30.16,64.3 v1(30.2,64.3) ; v1(26.8,34.6) 26.827,34.573 30.29,34.573 v1(30.317,34.546)
  Bottom Layer w0.2: v1(25.3,58) v1(27,58)
  Bottom Layer w0.254: v1(7.3,56.7) 7.34,56.7 7.44,56.6 v1(8.6,56.6) ; X1.01 X1.07 17.475,6.02 X2.07 X2.01 29.21,6.02 30.302,7.112 v1@30.302,34.5 ; v1(21.1,32.4) 23.3,34.6 v1(26.8,34.6) ; v1(30.2,64.3) 30.2,57.694 30.3,57.594 v1(30.3,57.5) 33.45,54.35 33.45,50.659 32.5,49.709 32.5,46.804 ; v1(30.317,34.546) 32.5,36.729 32.5,46.804 ; v1(30.993,48.311) 32.5,46.804
A0_EEPROM: R9.2 R14.1 U2.1 | length 7
  Top Layer w0.127: R14.1 4,54.9 ; R9.2 4,54.9 ; U2.1 6.475,56.505 6.712,56.269 6.712,55.971 7.039,55.644 7.039,54.826 6.884,54.672 5.116,54.672 4.887,54.9 4,54.9
A0_GPIO: R32.2 R39.1 U3.21 | length 9
  Top Layer w0.127: R32.2 19.381,34.973 19.767,34.586 19.767,33.459 19.381,33.073 R39.1 19.427,33.073 19.814,32.686 19.814,32.636 20.141,32.309 20.141,29.956 20.137,29.952 20.137,28.208 20.62,27.725 U3.21
A0A: R42A.2 R47A.1 U4A.1 | length 5.6
  Top Layer w0.15: R47A.1 R42A.2 21.105,47.905 U4A.1
A0B: R42B.2 R47B.1 U4B.1 | length 5.6
  Top Layer w0.15: R47B.1 R42B.2 21.105,56.405 U4B.1
A1_EEPROM: R10.2 R15.1 U2.2 | length 5.7
  Top Layer w0.127: R15.1 R10.2 2.55,55.6 3.264,56.314 4.609,56.314 4.949,55.974 4.949,55.811 5.525,55.235 U2.2
A1_GPIO: R33.2 R40.1 U3.2 | length 8.5
  Top Layer w0.15: U3.2 15.55,29.15 14.936,29.15 14.7,29.386 14.7,30.2 15.055,30.555 16.097,30.555 16.452,30.909 16.452,31.998 17.102,32.648 17.102,32.698 17.477,33.073 R40.1 R33.2
A1A: R43A.2 R48A.1 U4A.2 | length 11.7
  Top Layer w0.15: R48A.1 R43A.2
  Top Layer w0.254: R43A.2 19.3,47.9 20.1,48.7 24.2,48.7 24.8,48.1 24.8,47.335 24.1,46.635 U4A.2
A1B: R43B.2 R48B.1 U4B.2 | length 11.7
  Top Layer w0.15: R48B.1 R43B.2 19.3,56.4 20.1,57.2 24.195,57.2 24.8,56.595 24.8,55.835 24.1,55.135 U4B.2
A2_EEPROM: R11.2 R16.1 U2.3 | length 6.9
  Top Layer w0.127: R11.2 R16.1 1.05,54.2 1.764,53.486 5.046,53.486 5.525,53.965 U2.3
A2_GPIO: R34.2 R41.1 U3.3 | length 8.3
  Top Layer w0.15: U3.3 15.55,28.5 14.936,28.5 14.35,29.086 14.35,31.485 15.083,32.217 15.496,32.217 15.677,32.398 R41.1 R34.2
A2A: R44A.2 R49A.1 U4A.3 | length 10.2
  Top Layer w0.15: R49A.1 R44A.2
  Top Layer w0.254: R49A.1 17.45,44.7 18.229,43.921 21.736,43.921 23.18,45.365 U4A.3
A2B: R44B.2 R49B.1 U4B.3 | length 10.3
  Top Layer w0.15: R49B.1 R44B.2
  Top Layer w0.254: R49B.1 17.45,53.2 18.25,52.4 21.841,52.4 23.056,53.865 U4B.3
EXT_I2C1_SCL: R2.1 R6.1 R13.1 R23.1 R45A.1 R45B.1 X1.06 X2.06 | length 97.2
  Top Layer w0.15: R13.1 14.9,53.95 14.175,53.225 14.175,51.73 15.38,50.525 31.025,50.525 v2(31.5,51) ; R2.1 R2.1@22.5,61.15 ; R6.1 R2.1@22.5,61.15 ; X2.06 29.38,18.72 32,21.34 R23.1 32,30.55 32.725,31.275 32.725,44.625 32.312,45.038 32,45.038 R45A.1 32,45.45 32.8,46.25 v2@32.8,50.877 ; v2(32.923,50.877) v2@32.8,50.877 ; R2.1@22.5,61.15 23.116,61.766 23.225,61.875 25.025,61.875 28.2,58.7 29.913,58.7 32,56.613 R45B.1 32,53.85 32.8,53.05 32.8,51 v2@32.8,50.877
  Bottom Layer w0.15: v2(31.5,51) 32.732,51 32.855,50.877 v2(32.923,50.877)
  Bottom Layer w0.254: X1.06 10.843,17.577 24.157,17.577 X2.06
EXT_I2C1_SDA: R1.1 R7.1 R17.1 R24.1 R46A.1 R46B.1 X1.12 X2.12 | length 87
  Top Layer w0.15: R17.1 14.9,51.5 15.525,50.875 27.175,50.875 27.8,51.5 ; R7.1 R1.1 20.975,60.725 20.975,60.425 22.1,59.3 25,59.3 26.425,57.875 26.425,52.875 27.8,51.5 ; X2.12 23.829,18.72 25.709,20.6 30.1,20.6 31.125,21.625 31.125,31.075 32,31.95 R24.1 R46A.1 32,43.85 31.2,44.65 31.2,46 32,46.8 R46B.1@32,52.25 ; R46B.1 R46B.1@32,52.25 ; 27.8,51.5 31.2,51.5 31.575,51.875 31.625,51.875 R46B.1@32,52.25
  Bottom Layer w0.254: X1.12 17.475,18.72 X2.12
EXT_SPI0_CS: X1.10 X2.10 | length 10.5
  Bottom Layer w0.254: X1.10 17.475,13.64 X2.10
EXT_SPI0_MISO: X1.09 X2.09 | length 10.5
  Bottom Layer w0.254: X1.09 17.475,11.1 X2.09
EXT_SPI0_MOSI: X1.03 X2.03 | length 16.5
  Bottom Layer w0.254: X1.03 10.792,10.008 24.208,10.008 X2.03
EXT_SPI0_SCLK: X1.04 X2.04 | length 16.5
  Bottom Layer w0.254: X1.04 10.843,12.497 24.157,12.497 X2.04
EXT_UART1_RX: X1.05 X2.05 | length 16.5
  Bottom Layer w0.254: X1.05 10.843,15.037 24.157,15.037 X2.05
EXT_UART1_TX: X1.11 X2.11 | length 10.5
  Bottom Layer w0.254: X1.11 17.475,16.18 X2.11
FrontPanel_LED1: D4.1 U3.4 X5.1
FrontPanel_LED2: D5.1 U3.5 X5.2
FrontPanel_LED3: D6.1 U3.6 X5.3
FrontPanel_LED4: D7.1 U3.7 X5.4
FrontPanel_switch5: R26.2 U3.13 X6.1 | length 4.2
  Top Layer w0.15: U3.13 21.9,22.425 22.175,22.7 22.835,22.7 23.355,23.22 X6.1
FrontPanel_switch6: R27.2 U3.14 X6.2 | length 4.9
  Top Layer w0.15: U3.14 22.815,23.175 X6.2
FrontPanel_switch7: R29.2 U3.15 X6.3 | length 6.9
  Top Layer w0.15: U3.15 22.925,23.825 24.1,25 24.1,25.98 25.395,27.275 25.395,28.295 X6.3
FrontPanel_switch8: R30.2 U3.16 X6.4 | length 8.3
  Top Layer w0.15: U3.16 21.65,24.6 22.264,24.6 23.75,26.086 23.75,26.241 24.325,26.816 24.325,28.745 25.395,29.815 25.395,30.835 X6.4
GND: BT1.1 C1.2 C2.2 C3.1 C4.1 C5.2 C6.2 C7.2 C8.2 C9.2 C10A.2 C10B.2 D1.1 R12.2 R14.2 R15.2 R16.2 R26.1 R27.1 R29.1 R30.1 R31.1 R36.1 R37.1 R38.1 R39.2 R40.2 R41.2 R47A.2 R47B.2 R48A.2 R48B.2 R49A.2 R49B.2 U1.4 U2.4 U3.12 U4A.4 U4B.4 X1.02 X1.08 X2.02 X2.08 | length 11.3
  Top Layer w0.254: R16.2@0.695,52.695 U2.4 ; R16.2 R16.2@1.095,52.695 ; v2(14.915,31.075) 14.954,31.075 15.029,31.15 15.354,31.15 R41.2 ; R49B.2 R48B.2 R47B.2 ; v1(22.4,32.4) 22.45,32.35 22.45,31.25 C9.2
  other v1: 15.6,21.3 2,24.5 2.1,27.1 2,29.7 18.5,30.1 2.1,32.2 2.1,34.8 2.2,37.1 2.1,39.6 25,44.1 31.159,47.259 6,51.5 25.2,52.6 16.5,54.4 31.4,55.3 9.4,58.1 27.9,62.9 5.5,81.9 2.8,84.5
  other v2: 19.992,10.552 20,11.7 19.9,13.1 19.9,14.3 19.052,15.617 19,16.8
INT: R5.1 TP1.1 | length 5.1
  Top Layer w0.254: R5.1 17.2,18 18.2,18 TP1.1
IO0_4: D8.1 U3.8 X5.5 | length 12.2
  Top Layer w0.15: 6.2,30.84 X5.5 10.625,30.115 10.625,29.545 14.92,25.25 15.55,25.25 U3.8
IO0_5: D9.1 U3.9 X5.6 | length 11.1
  Top Layer w0.15: 6.2,28.3 X5.6 13.725,24.475 U3.9
IO0_6: D10.1 U3.10 X5.7 | length 10.3
  Top Layer w0.15: 6.2,25.76 X5.7 11.835,23.825 U3.10
IO0_7: D11.1 U3.11 X5.8 | length 9.5
  Top Layer w0.127: 6.2,23.22 X5.8 15.63,23.22 U3.11
IO1_4: R31.2 U3.17 X6.5 | length 10.2
  Top Layer w0.15: U3.17 21.65,25.25 22.264,25.25 23.4,26.386 23.846,26.832 23.846,28.766 24.293,29.213 24.293,32.273 X6.5
IO1_5: R36.2 U3.18 X6.6 | length 12.1
  Top Layer w0.15: U3.18 21.65,25.9 22.264,25.9 23.3,26.936 23.3,28.715 23.943,29.358 23.943,34.463 X6.6
IO1_6: R37.2 U3.19 X6.7 | length 14.1
  Top Layer w0.15: U3.19 21.65,26.55 22.357,26.55 22.95,27.143 22.95,28.86 23.593,29.503 23.593,36.653 X6.7
IO1_7: R38.2 U3.20 X6.8 | length 16
  Top Layer w0.15: U3.20 21.65,27.2 22.512,27.2 22.6,27.288 22.6,29.005 23.243,29.648 23.243,38.843 X6.8
NetC5_1: C5.1 U1.1 Y1.1 | length 6.3
  Top Layer w0.254: C5.1 7.95,69.9 8,69.95 Y1.1 10.262,69.95 11.507,68.705 U1.1
NetC6_1: C6.1 U1.2 Y1.2 | length 5.8
  Top Layer w0.254: C6.1 7.95,67.5 8,67.45 Y1.2 10.871,67.45 10.886,67.435 U1.2
NetD1_2: D1.2 R3.1 | length 1.8
  Top Layer w0.254: R3.1 D1.2
NetD4_2: D4.2 R18.2 | length 1.7
  Top Layer w0.127: D4.2 R18.2
NetD5_2: D5.2 R19.2 | length 1.7
  Top Layer w0.127: D5.2 R19.2
NetD6_2: D6.2 R20.2 | length 1.7
  Top Layer w0.127: D6.2 R20.2
NetD7_2: D7.2 R21.2 | length 1.7
  Top Layer w0.127: D7.2 R21.2
NetD8_2: D8.2 R22.2 | length 1.7
  Top Layer w0.127: D8.2 R22.2
NetD9_2: D9.2 R25.2 | length 1.7
  Top Layer w0.127: D9.2 R25.2
NetD10_2: D10.2 R28.2 | length 1.7
  Top Layer w0.127: D10.2 R28.2
NetD11_2: D11.2 R35.2 | length 1.7
  Top Layer w0.127: D11.2 R35.2
NetR4_1: R4.1 U1.8 | length 3.2
  Top Layer w0.254: U1.8 19.279,68.705 19.284,68.7 R4.1
NetR5_2: R5.2 TP4.1 U1.3 | length 69.7
  Top Layer w0.127: U1.3 9.965,66.165 8,64.2 8,44.1 6.9,43 1.9,43 0.6,41.7 0.6,21.8 2,20.4 13,20.4 13.8,19.6 R5.2
NetR6_2: R6.2 U1.6 | length 5.7
  Top Layer w0.254: U1.6 18.136,66.165 18.794,65.507 22.221,65.507 22.5,65.227 R6.2
NetR7_2: R7.2 U1.5 | length 3
  Top Layer w0.254: U1.5 19.05,64.895 19.245,64.7 R7.2
NetR13_2: R13.2 U2.6 | length 1.9
  Top Layer w0.127: U2.6 13.265,53.965 R13.2
NetR17_2: R17.2 U2.5 | length 2
  Top Layer w0.127: U2.5 13.105,52.695 R17.2
NetR23_2: R23.2 U3.22 | length 11.6
  Top Layer w0.15: v2(20.6,28.4) 20.625,28.375 U3.22 ; v2(26.1,29.7) 29.6,29.7 29.975,30.075 30.025,30.075 30.4,30.45 R23.2
  Bottom Layer w0.15: v2(20.6,28.4) 20.668,28.4 20.793,28.525 20.797,28.525 21.972,29.7 v2(26.1,29.7)
NetR24_2: R24.2 U3.23 | length 12
  Top Layer w0.15: v2(20.6,29) 20.625,29.025 U3.23 ; v2(26.011,31.873) 26.078,31.873 26.205,32 R24.2
  Bottom Layer w0.15: v2(20.6,29) 23.515,31.915 25.969,31.915 v2(26.011,31.873)
NetR45A_2: R45A.2 U4A.6 | length 2.1
  Top Layer w0.254: U4A.6 30.365,45.365 R45A.2
NetR45B_2: R45B.2 U4B.6 | length 2.1
  Top Layer w0.254: U4B.6 30.365,53.865 R45B.2
NetR46A_2: R46A.2 U4A.5 | length 2.2
  Top Layer w0.254: U4A.5 30.105,44.095 R46A.2
NetR46B_2: R46B.2 U4B.5 | length 2.2
  Top Layer w0.254: U4B.5 29.405,52.595 29.7,52.3 R46B.2
NetTP5_1: TP5.1 U1.7 | length 2.4
  Top Layer w0.254: U1.7 19.065,67.435 TP5.1
V_BATT: BT1.2 D3.1 TP2.1 | length 13.3
  Top Layer w0.254: D3.1 TP2.1 26.9,76.2 BT1.2
VDD: D2.2 D3.2 R4.2 TP3.1 | length 6.3
  Top Layer w0.254: R4.2 23.774,68.7 23.924,68.85 D3.2 ; D2.2 D3.2 ; TP3.1 26.312,69 26.162,68.85 D3.2
VIN: 
WP: R8.2 R12.1 U2.7 | length 3.5
  Top Layer w0.127: U2.7 13.035,55.235 R12.1 R8.2
pads on no net: U3.1 U4A.7 U4B.7
copper on no net: | length 79.7
  Top Layer w0.127: 9.851,35.184 9.851,35.871 9.9,35.92
  Top Layer w0.15: 6.2,33.38 9.9,33.38 9.905,33.375 9.905,33.193 10.087,33.193 10.975,32.305 10.975,29.69 14.775,25.89 15.56,25.89 15.675,25.775 ; 6.2,35.92 9.9,35.92 ; 6.2,38.46 9.9,38.46 9.905,38.455 9.905,37.435 11.675,35.665 11.675,29.98 14.58,27.075 15.675,27.075 ; 6.2,41 9.9,41 9.9,39.975 9.905,39.975 12.025,37.855 12.025,30.125 14.425,27.725 15.675,27.725 ; 9.905,35.184 9.905,34.895 11.325,33.475 11.325,29.835 14.735,26.425 15.675,26.425 ; 15.675,29.775 15.9,29.55 16.414,29.55 17.2,28.764 17.2,19.6

## Polygon pours and split planes (outlines as drawn)
GND on Bottom Layer "GND_BOT" (solid, pour order 0): 0,0 35,0 35,100 0,100
GND on Top Layer "GND_TOP" (solid, pour order 1): 0,0 35,0 35,100 0,100

## Silkscreen, mask and mechanical layers (free items; w line width, h text height)
Top Overlay:
  text "JLCJLCJLCJLC" at 7.554,87.254 h1.2
  text "RTC" at 14.763,71.953 h1.8
  text "3V3" at 15.354,58.754 h1.2
  text "MAC1" at 28.963,58.153 h1.8
  text "EEPROM" at 0.213,57.953 h1.8
  text "A2" at 16.354,54.154 h1.2
  text "1" at 19.05,54.154 h1.2
  text "0" at 20.7,54.154 h1.2
  text "2" at 0.554,50.554 h1.2
  text "1" at 2.354,50.554 h1.2
  text "0" at 3.554,50.554 h1.2
  text "GND" at 13.354,50.254 h1.2
  text "MAC0" at 29.063,48.993 h1.8
  text "3V3" at 12.654,47.954 h1.2
  text "A2" at 15.754,45.654 h1.2
  text "1" at 19.05,45.654 h1.2
  text "0" at 20.7,45.654 h1.2
  text "GND" at 12.654,42.954 h1.2
  text "IO0" at 4.554,42.938 h1.52
  text "0" at 7.1,40.146 h1.2
  text "7" at 27.1,40.034 h1.2
  text "GPIO" at 13.425,39.353 h1.8
  text "1" at 7.1,37.606 h1.2
  text "A2" at 14.031,37.527 h1.2
  text "1" at 17.327,37.527 h1.2
  text "0" at 18.977,37.527 h1.2
  text "6" at 26.9,37.5 h1.2
  text "3V3" at 11.654,35.954 h1.2
  text "2" at 7.1,35.066 h1.2
  text "5" at 27.1,34.954 h1.2
  text "3" at 7.1,32.526 h1.2
  text "4" at 27.1,32.414 h1.2
  text "GND" at 11.654,31.654 h1.2
  text "4" at 7.1,29.986 h1.2
  text "3" at 27.1,29.874 h1.2
  text "5" at 7.1,27.446 h1.2
  text "2" at 27.1,27.334 h1.2
  text "6" at 6.85,24.906 h1.2
  text "1" at 27.1,24.794 h1.2
  text "7" at 7.1,22.366 h1.2
  text "0" at 27.1,22.254 h1.2
  text "IO1" at 30.654,20.038 h1.52
  text "3V3" at 15.654,4.954 h1.2
Mechanical 1:
  the board outline again, w0.1
Mechanical 13:
  circle w0.254: c14,84.6 r10

## Text inside footprints (layer, text, board x,y; h text height)
X5: Top Overlay "8" at 11.6,23.6 h1.02 r270; Top Overlay "1" at 11.6,41.12 h1.02 r270
X6: Top Overlay "8" at 23.7,40.62 h1.02 r90; Top Overlay "1" at 23.7,23.1 h1.02 r90